# EAGLE board Circuit (EAGLE 9.7.0)

Size 153.41 x 113.57 mm. Coordinates in mm from the lower left corner, seen from the top.
Outline: 0,0 153.41,0 153.41,113.57 0,113.57 0,0
Copper layers (1*16): Top 0.035mm / dielectric 1.5mm / Bottom 0.035mm
Design rules "default": minimum track width 6mil, minimum drill 0.35mm, track to track 6mil, track to pad 6mil, pad to pad 6mil, via to via 6mil, smd to smd 6mil, copper to edge 40mil, drill to drill 6mil, minimum pad ring 10mil, minimum via ring 8mil, stop-mask expansion 4mil, vias tented up to drill 0mil, thermal gap 10mil

## Footprints (pad centres in the part's own frame; a part is rotated, then mirrored left to right if it is on the bottom)
LEDRD254W60D565H860B = drill 0.981 pad 1.581: 1 -1.27,0; 2 1.27,0
LEDRD254W60D565H860B_G = drill 0.981 pad 1.581: 1 -1.27,0; 2 1.27,0
GL5528 = drill 0.8 pad 1.4: 1 -1.702,0; 2 1.702,0
RESAD1016W63L850D250B = drill 0.83 pad 1.43: 1 -5.08,0; 2 5.08,0
LCD-I2C = drill 1.016 long: 1 -19.05,-5.08; 2 -19.05,-7.62; 3 -19.05,-10.16; 4 -19.05,-12.7
ARDUINO-UNO-R3-SHIELD = drill 1.016 pad 1.88: 3.3V 24.13,-2.54; 5V 24.13,0; A0 24.13,12.7; A1 24.13,15.24; A2 24.13,17.78; A3 24.13,20.32; A4 24.13,22.86; A5 24.13,25.4; AREF -24.13,-13.97; D2 -24.13,20.32; D3 -24.13,17.78; D4 -24.13,15.24; D5 -24.13,12.7; D6 -24.13,10.16; D7 -24.13,7.62; D8 -24.13,3.81; D9 -24.13,1.27; D10 -24.13,-1.27; D11 -24.13,-3.81; D12 -24.13,-6.35; D13 -24.13,-8.89; GND@0 24.13,2.54; GND@1 24.13,5.08; GND@2 -24.13,-11.43; IOREF 24.13,-7.62; NC 24.13,-10.16; RES 24.13,-5.08; RX -24.13,25.4; SCL -24.13,-19.05; SDA -24.13,-16.51; TX -24.13,22.86; VIN 24.13,7.62
TO92 = drill 0.813 octagon: 1 -1.27,0; 2 0,1.905; 3 1.27,0

## Placement (x,y rotation side)
DFAN  RED  [LEDRD254W60D565H860B]  59.38,105.66 180 top
DLIGHT  GREEN  [LEDRD254W60D565H860B_G]  47.86,105.05 180 top
R1  PHOTOCELL_GL5528  [GL5528]  59.38,11.07 180 top
R3  220  [RESAD1016W63L850D250B]  49.13,99.97 90 top
R4  220  [RESAD1016W63L850D250B]  60.65,100.58 90 top
RRESISTOR  10k  [RESAD1016W63L850D250B]  65.18,17.11 90 top
U1  LCD-16X2-I2CSUNFOUNDER-IIC  [LCD-I2C]  97.78,36.63 0 top
UMAIN_BOARD  ARDUINO-UNO-R3-SHIELD  [ARDUINO-UNO-R3-SHIELD]  47.88,65.29 270 top
UTEMPERATURE_SENSOR  TMP36GT9Z_TO92  [TO92]  46,11.82 180 top

## Library data of the parts
DFAN = Tinkercad; CATEGORY: Opto-Electronic; SUB-CATEGORY: LED; VALUE: LED_RED
DLIGHT = Tinkercad; CATEGORY: Opto-Electronic; SUB-CATEGORY: LED; VALUE: LED_GREEN
R1 R3 R4 RRESISTOR U1 UMAIN_BOARD UTEMPERATURE_SENSOR = Tinkercad

## Nets
DFAN_A: DFAN.1 R4.2
DLIGHT_A: DLIGHT.1 R3.2
UMAIN_BOARD_5V: R1.2 U1.2 UMAIN_BOARD.5V UTEMPERATURE_SENSOR.3
UMAIN_BOARD_A0: R1.1 RRESISTOR.1 UMAIN_BOARD.A0
UMAIN_BOARD_A1: UMAIN_BOARD.A1 UTEMPERATURE_SENSOR.2
UMAIN_BOARD_A4: U1.3 UMAIN_BOARD.A4
UMAIN_BOARD_A5: U1.4 UMAIN_BOARD.A5
UMAIN_BOARD_D5: R4.1 UMAIN_BOARD.D5
UMAIN_BOARD_D9: R3.1 UMAIN_BOARD.D9
UMAIN_BOARD_GND: DFAN.2 DLIGHT.2 RRESISTOR.2 U1.1 UMAIN_BOARD.GND@0 UMAIN_BOARD.GND@1 UMAIN_BOARD.GND@2 UTEMPERATURE_SENSOR.1

## Tracks (layer width: path | path; a pad name or v marks a point on that pad's centre or on a via)
DFAN_A  (1 unrouted)
DLIGHT_A  (1 unrouted)
UMAIN_BOARD_5V  (3 unrouted)
UMAIN_BOARD_A0  (2 unrouted)
UMAIN_BOARD_A1  (1 unrouted)
UMAIN_BOARD_A4  (1 unrouted)
UMAIN_BOARD_A5  (1 unrouted)
UMAIN_BOARD_D5  (1 unrouted)
UMAIN_BOARD_D9  (1 unrouted)
UMAIN_BOARD_GND  (7 unrouted)